# EAGLE board CT_schematic (EAGLE 7.6.0)

Size 100 x 80 mm. Coordinates in mm from the lower left corner, seen from the top.
Outline: 0,0 100,0 100,80 0,80 0,0
Copper layers (1*16): Top 0.035mm / dielectric 1.5mm / Bottom 0.035mm
Design rules "default": minimum track width 10mil, minimum drill 24mil, track to track 8mil, track to pad 8mil, pad to pad 8mil, via to via 8mil, smd to smd 8mil, copper to edge 40mil, drill to drill 8mil, minimum pad ring 10mil, minimum via ring 8mil, stop-mask expansion 4mil, vias tented up to drill 0mil, thermal gap 10mil

## Footprints (pad centres in the part's own frame; a part is rotated, then mirrored left to right if it is on the bottom)
C0603 = smd 0.8 x 0.8: 1 -0.762,0; 2 0.762,0
C0402 = smd 0.5 x 0.5: 1 -0.508,0; 2 0.508,0
C0805 = smd 1.2 x 1.3: 1 -1.016,0; 2 1.016,0
C1210 = smd 1.2 x 2.5: 1 -1.524,0; 2 1.524,0
C1206 = smd 1.3 x 1.6: 1 -1.524,0; 2 1.524,0
L0603 = smd 0.8 x 0.8: 1 -0.762,0; 2 0.762,0
L1210 = smd 1.2 x 2.5: 1 -1.524,0; 2 1.524,0
L0806 = smd 1.016 x 1.524: 1 -0.889,0; 2 0.889,0
R0603 = smd 0.8 x 0.8: 1 -0.762,0; 2 0.762,0
LQFP144 = smd 0.35 x 1.35: 1 -8.75,-10.625; 2 -8.25,-10.625; 3 -7.75,-10.625; 4 -7.25,-10.625; 5 -6.75,-10.625; 6 -6.25,-10.625; 7 -5.75,-10.625; 8 -5.25,-10.625; 9 -4.75,-10.625; 10 -4.25,-10.625; 11 -3.75,-10.625; 12 -3.25,-10.625; 13 -2.75,-10.62; 14 -2.25,-10.625; 15 -1.75,-10.625; 16 -1.25,-10.625; 17 -0.75,-10.625; 18 -0.25,-10.625; 19 0.25,-10.625; 20 0.75,-10.625; 21 1.25,-10.625; 22 1.75,-10.625; 23 2.25,-10.625; 24 2.75,-10.62; 25 3.25,-10.625; 26 3.75,-10.625; 27 4.25,-10.625; 28 4.75,-10.625; 29 5.25,-10.625; 30 5.75,-10.625; 31 6.25,-10.625; 32 6.75,-10.625; 33 7.25,-10.625; 34 7.75,-10.625; 35 8.25,-10.625; 36 8.75,-10.625; 73 8.75,10.625; 74 8.25,10.625; 75 7.75,10.625; 76 7.25,10.625; 77 6.75,10.625; 78 6.25,10.625; 79 5.75,10.625; 80 5.25,10.625; 81 4.75,10.625; 82 4.25,10.625; 83 3.75,10.625; 84 3.25,10.625; 85 2.75,10.625; 86 2.25,10.625; 87 1.75,10.625; 88 1.25,10.625; 89 0.75,10.625; 90 0.25,10.625; 91 -0.25,10.625; 92 -0.75,10.625; 93 -1.25,10.625; 94 -1.75,10.625; 95 -2.25,10.625; 96 -2.75,10.625; 97 -3.25,10.625; 98 -3.75,10.625; 99 -4.25,10.625; 100 -4.75,10.625; 101 -5.25,10.625; 102 -5.75,10.625; 103 -6.25,10.625; 104 -6.75,10.625; 105 -7.25,10.625; 106 -7.75,10.625; 107 -8.25,10.625; 108 -8.75,10.625 | smd 1.35 x 0.35: 37 10.625,-8.75; 38 10.625,-8.25; 39 10.625,-7.75; 40 10.625,-7.25; 41 10.625,-6.75; 42 10.625,-6.25; 43 10.625,-5.75; 44 10.625,-5.25; 45 10.625,-4.75; 46 10.625,-4.25; 47 10.625,-3.75; 48 10.625,-3.25; 49 10.625,-2.75; 50 10.625,-2.25; 51 10.625,-1.75; 52 10.625,-1.25; 53 10.625,-0.75; 54 10.625,-0.25; 55 10.625,0.25; 56 10.625,0.75; 57 10.625,1.25; 58 10.625,1.75; 59 10.625,2.25; 60 10.625,2.75; 61 10.625,3.25; 62 10.625,3.75; 63 10.625,4.25; 64 10.625,4.75; 65 10.625,5.25; 66 10.625,5.75; 67 10.625,6.25; 68 10.625,6.75; 69 10.625,7.25; 70 10.625,7.75; 71 10.625,8.25; 72 10.625,8.75; 109 -10.625,8.75; 110 -10.625,8.25; 111 -10.625,7.75; 112 -10.625,7.25; 113 -10.625,6.75; 114 -10.625,6.25; 115 -10.625,5.75; 116 -10.625,5.25; 117 -10.625,4.75; 118 -10.625,4.25; 119 -10.625,3.75; 120 -10.625,3.25; 121 -10.625,2.75; 122 -10.625,2.25; 123 -10.625,1.75; 124 -10.625,1.25; 125 -10.625,0.75; 126 -10.625,0.25; 127 -10.625,-0.25; 128 -10.625,-0.75; 129 -10.625,-1.25; 130 -10.625,-1.75; 131 -10.625,-2.25; 132 -10.625,-2.75; 133 -10.625,-3.25; 134 -10.625,-3.75; 135 -10.625,-4.25; 136 -10.625,-4.75; 137 -10.625,-5.25; 138 -10.625,-5.75; 139 -10.625,-6.25; 140 -10.625,-6.75; 141 -10.625,-7.25; 142 -10.625,-7.75; 143 -10.625,-8.25; 144 -10.625,-8.75
TST-110-05-T-D-RA = drill 1 pad 1.7 square: 1 0,0 | drill 1 pad 1.7: 2 0,2.54; 3 2.54,0; 4 2.54,2.54; 5 5.08,0; 6 5.08,2.54; 7 7.62,0; 8 7.62,2.54; 9 10.16,0; 10 10.16,2.54; 11 12.7,0; 12 12.7,2.54; 13 15.24,0; 14 15.24,2.54; 15 17.78,0; 16 17.78,2.54; 17 20.32,0; 18 20.32,2.54; 19 22.86,0; 20 22.86,2.54
SSOP-20 = smd 1.651 x 0.432: 1 -3.48,2.925; 2 -3.48,2.275; 3 -3.48,1.625; 4 -3.48,0.975; 5 -3.48,0.325; 6 -3.48,-0.325; 7 -3.48,-0.975; 8 -3.48,-1.625; 9 -3.48,-2.275; 10 -3.48,-2.925; 11 3.48,-2.925; 12 3.48,-2.275; 13 3.48,-1.625; 14 3.48,-0.975; 15 3.48,-0.325; 16 3.48,0.325; 17 3.48,0.975; 18 3.48,1.625; 19 3.48,2.275; 20 3.48,2.925
HTSS-105-01-G-D = drill 1 pad 1.8 square: 1 0,0 | drill 1 pad 1.8: 2 0,2.54; 3 2.54,0; 4 2.54,2.54; 5 5.08,0; 6 5.08,2.54; 7 7.62,0; 8 7.62,2.54; 9 10.16,0; 10 10.16,2.54
FCI_10118193-0001LF = smd 0.4 x 1.35: 1 -1.3,2.675; 2 -0.65,2.675; 3 0,2.675; 4 0.65,2.675; 5 1.3,2.675 | smd 1.6 x 1.4: 6 -3.2,2.45; 7 3.2,2.45 | smd 1.9 x 1.9: 8 -1.2,0; 9 1.2,0 | hole 0.5: -3.3,0; 3.3,0
SOT143B = smd 1 x 0.7: 1 -0.75,-1 | smd 0.6 x 0.7: 2 0.95,-1; 3 0.95,1; 4 -0.95,1
QFN-28 = smd 0.813 x 0.305: 1 -2.451,1.5; 2 -2.451,1; 3 -2.451,0.5; 4 -2.451,0; 5 -2.451,-0.5; 6 -2.451,-1; 7 -2.451,-1.5; 15 2.451,-1.5; 16 2.451,-1; 17 2.451,-0.5; 18 2.451,0; 19 2.451,0.5; 20 2.451,1; 21 2.451,1.5 | smd 0.305 x 0.813: 8 -1.5,-2.451; 9 -1,-2.451; 10 -0.5,-2.451; 11 0,-2.451; 12 0.5,-2.451; 13 1,-2.451; 14 1.5,-2.451; 22 1.5,2.451; 23 1,2.451; 24 0.5,2.451; 25 0,2.451; 26 -0.5,2.451; 27 -1,2.451; 28 -1.5,2.451 | smd 3.607 x 3.607: 29 0,0
SJ-43515TS-SMT-TR = smd 2.2 x 3: 1 0.6,-7.4; 4 3.4,-7.4 | smd 3 x 3: 2 12.8,-7.4; 5 17,-3 | smd 2 x 3: 3 5.3,0; 6 2.5,0 | drill 1.8: P$7 4.5,-3.69; P$8 11.54,-3.69
ABS07-32.768KHZ-7-T = smd 1.1 x 2.4: 1 -2.5,0; 2 0,0
ABLS-25.000MHZ-B2F-T = smd 5.6 x 2.8: 1 -3.81,0; 2 5.69,0
ASFL1 = smd 1.7 x 1.5: 1 -1.27,-1.1; 2 1.27,-1.1; 3 1.27,1.1; 4 -1.27,1.1
TSOT-23-5 = smd 1.3 x 0.62: 1 -1.31,0.95; 2 -1.31,0; 3 -1.31,-0.95; 4 1.31,-0.95; 5 1.31,0.95
DFN8_2X3MC = smd 0.813 x 0.305: 1 -1.398,0.75; 2 -1.398,0.25; 3 -1.398,-0.25; 4 -1.398,-0.75; 5 1.398,-0.75; 6 1.398,-0.25; 7 1.398,0.25; 8 1.398,0.75 | smd 1.753 x 1.549: 9 0,0
JST-2-SMD = smd 1 x 4.6: 1 -1,-3.7; 2 1,-3.7 | smd 1.6 x 3.4: NC1 -3.4,1.5; NC2 3.4,1.5
SON-6 = smd 0.55 x 0.3: 1 -0.355,0.5 | smd 0.52 x 0.3: 2 -0.37,0; 3 -0.37,-0.5; 4 0.37,-0.5; 5 0.37,0; 6 0.37,0.5
SW_4-1437565-2 = smd 1.4 x 2.1: 1 -2.23,4.55; 2 -2.23,-4.55; 3 2.23,4.55; 4 2.23,-4.55
LGM67K-G1J2-24-Z = smd 0.8 x 1.4: A -2,0; C 0,0
NC7SZ125M5X = smd 1.3 x 0.7: 1 -1.3,0.95; 2 -1.3,0; 3 -1.3,-0.95; 4 1.3,-0.95; 5 1.3,0.95
DUMMY_PACKAGE_190 = drill 0.3: 1 0,-1; 2 1.5,-1

## Placement (x,y rotation side)
C1  1e-06  [C0603]  -33.02,77.47 0 top  (outside the outline)
C2  1e-07  [C0603]  -36.83,77.47 0 top  (outside the outline)
C3  1e-07  [C0603]  -40.64,77.47 0 top  (outside the outline)
C4  1e-07  [C0603]  -44.45,77.47 0 top  (outside the outline)
C5  1e-07  [C0603]  -48.26,77.47 0 top  (outside the outline)
C6  1e-07  [C0603]  -52.07,77.47 0 top  (outside the outline)
C7  1e-07  [C0603]  -55.88,77.47 0 top  (outside the outline)
C8  1e-07  [C0603]  -59.69,77.47 0 top  (outside the outline)
C9  1e-07  [C0603]  -63.5,77.47 0 top  (outside the outline)
C10  1e-07  [C0603]  -67.31,77.47 0 top  (outside the outline)
C11  1e-07  [C0603]  -71.12,77.47 0 top  (outside the outline)
C12  1e-07  [C0603]  -74.93,77.47 0 top  (outside the outline)
C13  1e-07  [C0603]  -78.74,77.47 0 top  (outside the outline)
C14  4.7e-06  [C0603]  -29.21,77.47 0 top  (outside the outline)
C15  1e-08  [C0603]  -15.24,82.55 0 top  (outside the outline)
C16  1e-06  [C0603]  -19.05,82.55 0 top  (outside the outline)
C17  1e-11  [C0402]  -57.15,82.55 0 top  (outside the outline)
C18  1e-11  [C0402]  -60.96,82.55 0 top  (outside the outline)
C19  1e-11  [C0402]  -64.77,82.55 0 top  (outside the outline)
C20  1e-11  [C0402]  -68.58,82.55 0 top  (outside the outline)
C21  1e-07  [C0402]  -72.39,82.55 0 top  (outside the outline)
C22  1e-06  [C0603]  -22.86,82.55 0 top  (outside the outline)
C23  1e-06  [C0603]  -26.67,82.55 0 top  (outside the outline)
C24  1e-06  [C0603]  -30.48,82.55 0 top  (outside the outline)
C25  4.7e-06  [C0805]  -40.64,66.04 0 top  (outside the outline)
C26  2.2e-05  [C1210]  -57.15,58.42 0 top  (outside the outline)
C27  2.2e-05  [C1210]  -63.5,58.42 0 top  (outside the outline)
C28  1e-09  [C0402]  -76.2,82.55 0 top  (outside the outline)
C29  1e-09  [C0402]  -80.01,82.55 0 top  (outside the outline)
C30  1e-07  [C0402]  -15.24,87.63 0 top  (outside the outline)
C31  1e-07  [C0402]  -19.05,87.63 0 top  (outside the outline)
C32  1e-07  [C0402]  -22.86,87.63 0 top  (outside the outline)
C33  1e-07  [C0402]  -26.67,87.63 0 top  (outside the outline)
C34  1e-07  [C0402]  -30.48,87.63 0 top  (outside the outline)
C35  1e-05  [C0805]  -45.72,66.04 0 top  (outside the outline)
C36  1e-05  [C0805]  -50.8,66.04 0 top  (outside the outline)
C37  1e-05  [C0805]  -55.88,66.04 0 top  (outside the outline)
C38  1e-05  [C0805]  -60.96,66.04 0 top  (outside the outline)
C39  1e-05  [C0805]  -66.04,66.04 0 top  (outside the outline)
C40  1e-08  [C0402]  -34.29,87.63 0 top  (outside the outline)
C41  1e-05  [C0805]  -71.12,66.04 0 top  (outside the outline)
C42  1e-05  [C0805]  -76.2,66.04 0 top  (outside the outline)
C43  1e-07  [C0402]  -38.1,87.63 0 top  (outside the outline)
C44  1e-05  [C1206]  -76.2,58.42 0 top  (outside the outline)
C45  1e-05  [C1206]  -16.51,66.04 0 top  (outside the outline)
C46  1e-08  [C0402]  -41.91,87.63 0 top  (outside the outline)
C47  1e-08  [C0402]  -45.72,87.63 0 top  (outside the outline)
F1  240.0  [L0603]  -34.29,82.55 0 top  (outside the outline)
I1  1.5e-05  [L1210]  -69.85,58.42 0 top  (outside the outline)
I2  1.5e-06  [L0806]  -22.86,66.04 0 top  (outside the outline)
R2  1000.0  [R0603]  -38.1,82.55 0 top  (outside the outline)
R4  4700.0  [R0603]  -41.91,82.55 0 top  (outside the outline)
R5  10000.0  [R0603]  -58.42,72.39 0 top  (outside the outline)
R6  10000.0  [R0603]  -63.5,72.39 0 top  (outside the outline)
R7  100000.0  [R0603]  -27.94,72.39 0 top  (outside the outline)
R8  100000.0  [R0603]  -33.02,72.39 0 top  (outside the outline)
R9  100000.0  [R0603]  -38.1,72.39 0 top  (outside the outline)
R10  47000.0  [R0603]  -68.58,72.39 0 top  (outside the outline)
R11  47000.0  [R0603]  -73.66,72.39 0 top  (outside the outline)
R12  47000.0  [R0603]  -78.74,72.39 0 top  (outside the outline)
R13  680.0  [R0603]  -45.72,82.55 0 top  (outside the outline)
R14  220000.0  [R0603]  -43.18,72.39 0 top  (outside the outline)
R15  1000000.0  [R0603]  -22.86,72.39 0 top  (outside the outline)
R16  10000.0  [R0603]  -15.24,77.47 0 top  (outside the outline)
R17  10000.0  [R0603]  -20.32,77.47 0 top  (outside the outline)
R18  9100.0  [R0603]  -49.53,82.55 0 top  (outside the outline)
R19  680000.0  [R0603]  -48.26,72.39 0 top  (outside the outline)
R20  120000.0  [R0603]  -53.34,72.39 0 top  (outside the outline)
R21  2000.0  [R0603]  -53.34,82.55 0 top  (outside the outline)
R22  10000.0  [R0603]  -25.4,77.47 0 top  (outside the outline)
U1  STM32F303ZDT6  [LQFP144]  -24.13,11.43 0 top  (outside the outline)
U2  TST-110-05-T-D-RA  [TST-110-05-T-D-RA]  -46.99,49.53 0 top  (outside the outline)
U3  MAX3218EAP+T  [SSOP-20]  -36.83,41.91 0 top  (outside the outline)
U4  HTSS-105-01-G-D  [HTSS-105-01-G-D]  -27.94,41.91 0 top  (outside the outline)
U5  10118193-0001LF  [FCI_10118193-0001LF]  -68.58,41.91 0 top  (outside the outline)
U6  prtr5v0u2ax  [SOT143B]  -58.42,87.63 0 top  (outside the outline)
U7  WM8731CLSEFL  [QFN-28]  -49.53,59.69 0 top  (outside the outline)
U8  SJ-43515TS-SMT-TR  [SJ-43515TS-SMT-TR]  -62.23,10.16 0 top  (outside the outline)
U9  SJ-43515TS-SMT-TR  [SJ-43515TS-SMT-TR]  -39.37,33.02 0 top  (outside the outline)
U10  ABS07-32.768KHZ-7-T  [ABS07-32.768KHZ-7-T]  -27.94,59.69 0 top  (outside the outline)
U11  ABLS-25.000MHZ-B2F-T  [ABLS-25.000MHZ-B2F-T]  -62.23,52.07 0 top  (outside the outline)
U12  ASFL1-12.288MHZ-EC-T  [ASFL1]  -59.69,43.18 0 top  (outside the outline)
U13  ltc3406es5  [TSOT-23-5]  -15.24,71.12 0 top  (outside the outline)
U14  MCP73831T-2ACI/MC  [DFN8_2X3MC]  -72.39,86.36 0 top  (outside the outline)
U15  S2B-PH-SM4-TB(LF)(SN)  [JST-2-SMD]  -69.85,29.21 0 top  (outside the outline)
U16  TPS3895ADRYR  [SON-6]  -66.04,86.36 0 top  (outside the outline)
U17  4-1437565-2  [SW_4-1437565-2]  -55.88,29.21 0 top  (outside the outline)
U18  Q65110A2395  [LGM67K-G1J2-24-Z]  -36.83,59.69 0 top  (outside the outline)
U19  nc7sz125m5x  [NC7SZ125M5X]  -27.94,66.04 0 top  (outside the outline)
U20  nc7sz125m5x  [NC7SZ125M5X]  -34.29,66.04 0 top  (outside the outline)
U21  Dummy  [DUMMY_PACKAGE_190]  -63.5,87.63 0 top  (outside the outline)

## Library data of the parts
C1-C47 F1 I1 I2 R2 R4-R22 U1-U21 = circuit_tree

## Nets
CLK_CRYSTAL_U1_8: C17.1 U1.8 U10.1
CLK_CRYSTAL_U1_9: C18.1 U1.9 U10.2
CLK_CRYSTAL_U1_23: C19.1 U1.23 U11.1
CLK_CRYSTAL_U1_24: C20.1 U1.24 U11.2
CLK_U7_1: U7.1 U12.3
GND: C1.2 C2.2 C3.2 C4.2 C5.2 C6.2 C7.2 C8.2 C9.2 C10.2 C11.2 C12.2 C13.2 C14.2 C15.2 C16.2 C17.2 C18.2 C19.2 C20.2 C21.2 C22.2 C23.2 C24.2 C29.2 C30.2 C31.2 C32.2 C33.2 C34.2 C35.2 C36.2 C37.2 C38.2 C39.2 C40.2 C41.2 C42.1 C42.2 C43.2 C44.2 C45.2 C46.2 C47.2 R2.2 R5.2 R10.2 R11.2 R12.2 R14.2 R18.2 R20.2 R21.2 U1.16 U1.30 U1.31 U1.38 U1.51 U1.61 U1.71 U1.83 U1.94 U1.107 U1.120 U1.130 U1.143 U2.4 U2.6 U2.8 U2.10 U2.12 U2.14 U2.16 U2.18 U2.20 U3.5 U3.17 U3.20 U4.9 U5.5 U5.6 U5.7 U5.8 U5.9 U6.1 U7.4 U7.15 U7.19 U7.25 U7.26 U7.29 U8.1 U9.1 U12.2 U13.2 U14.6 U14.9 U15.2 U16.2 U18.C U19.2 U19.3 U20.1 U20.3 U21.1
INPUT_USBPOWER_5V: C44.1 R22.2 U5.1 U6.4 U14.1 U14.2
NET_U1_25: R4.1 U1.25 U20.4
NET_U1_33: C15.1 C16.1 F1.1 U1.32 U1.33
NET_U1_138: R5.1 U1.138
NET_U1_141: U18.A
NET_U1_142: U17.3 U17.4
NET_U3_1: I1.1 U3.1
NET_U3_2: R7.1 U3.2
NET_U3_3: R8.1 U3.3
NET_U3_4: R9.1 U3.4
NET_U3_15: C24.1 U3.15
NET_U3_16: C25.2 U3.16
NET_U3_18: C25.1 U3.18
NET_U3_19: C23.1 U3.19
NET_U4_3: U3.12 U4.3
NET_U4_4: U3.11 U4.4
NET_U4_5: U3.14 U4.5
NET_U4_6: U3.13 U4.6
NET_U7_9: U7.9
NET_U7_20: C34.1 C39.1 U7.20
NET_U8_2: C27.1 R11.1 U8.2
NET_U8_5: C26.1 R10.1 U8.5
NET_U8_13: C26.2
NET_U8_14: C27.2
NET_U9_5: C28.1 C29.1 R12.1 R13.1 U9.5
NET_U9_21: R13.2
NET_U9_22: C28.2
NET_U13_1: U13.1
NET_U13_3: I2.1 U13.3
NET_U13_5: R14.1 R15.1 U13.5
NET_U13_ATNET_3: I2.2 R15.2
NET_U14_5: R22.1 U14.5
NET_U14_8: R21.1 U14.8
NET_U16_1: R17.1 R18.1 U16.1
NET_U16_3: R19.2 R20.1 U16.3
NET_U16_4: R16.1 U16.4 U19.4 U20.2
NET_U17_1: R2.1 U17.1 U17.2
PROC_DAC1_OUT2: U1.41 U21.2
PROC_I2S2_CK: U1.74 U7.7
PROC_I2S2_EXT_SD: U1.75 U7.10
PROC_I2S2_SD: U1.76 U7.8
PROC_I2S2_WS: U1.73 U7.9 U7.11
PROC_SYS_JTCK_SWCLK: U1.109 U2.9
PROC_SYS_JTDO_TRACESWO: U1.133 U2.13
PROC_SYS_JTMS_SWDIO: U1.105 U2.7
PROC_UART4_RX: U1.112 U3.9
PROC_UART4_TX: U1.111 U3.7
PROC_USB_DM: U1.103 U5.2 U6.3
PROC_USB_DP: U1.104 U5.3 U6.2
RST_OUT_U2_SRESET_B: R6.1 U2.15 U19.1
VCC_S1_3V7: C41.1 C45.1 U13.4 U14.3 U14.4 U15.1
VCC_TIER1_3V3: C1.1 C2.1 C3.1 C4.1 C5.1 C6.1 C7.1 C8.1 C9.1 C10.1 C11.1 C12.1 C13.1 C14.1 C21.1 C22.1 C30.1 C31.1 C32.1 C33.1 C35.1 C36.1 C37.1 C38.1 C40.1 C42.2 C43.1 C46.1 C47.1 F1.2 I1.2 I2.2 R4.2 R6.2 R7.2 R8.2 R9.2 R15.2 R16.2 R17.2 R19.1 U1.6 U1.17 U1.39 U1.52 U1.62 U1.72 U1.84 U1.95 U1.108 U1.121 U1.131 U1.144 U2.1 U3.6 U7.3 U7.5 U7.12 U7.18 U12.4 U16.6 U19.5 U20.5

## Tracks (layer width: path | path; a pad name or v marks a point on that pad's centre or on a via)
CLK_CRYSTAL_U1_8  (2 unrouted)
CLK_CRYSTAL_U1_9  (2 unrouted)
CLK_CRYSTAL_U1_23  (2 unrouted)
CLK_CRYSTAL_U1_24  (2 unrouted)
CLK_U7_1  (1 unrouted)
GND  (104 unrouted)
INPUT_USBPOWER_5V  (5 unrouted)
NET_U1_25  (2 unrouted)
NET_U1_33  (4 unrouted)
NET_U1_138  (1 unrouted)
NET_U1_142  (1 unrouted)
NET_U3_1  (1 unrouted)
NET_U3_2  (1 unrouted)
NET_U3_3  (1 unrouted)
NET_U3_4  (1 unrouted)
NET_U3_15  (1 unrouted)
NET_U3_16  (1 unrouted)
NET_U3_18  (1 unrouted)
NET_U3_19  (1 unrouted)
NET_U4_3  (1 unrouted)
NET_U4_4  (1 unrouted)
NET_U4_5  (1 unrouted)
NET_U4_6  (1 unrouted)
NET_U7_20  (2 unrouted)
NET_U8_2  (2 unrouted)
NET_U8_5  (2 unrouted)
NET_U9_5  (4 unrouted)
NET_U13_3  (1 unrouted)
NET_U13_5  (2 unrouted)
NET_U13_ATNET_3  (1 unrouted)
NET_U14_5  (1 unrouted)
NET_U14_8  (1 unrouted)
NET_U16_1  (2 unrouted)
NET_U16_3  (2 unrouted)
NET_U16_4  (3 unrouted)
NET_U17_1  (2 unrouted)
PROC_DAC1_OUT2  (1 unrouted)
PROC_I2S2_CK  (1 unrouted)
PROC_I2S2_EXT_SD  (1 unrouted)
PROC_I2S2_SD  (1 unrouted)
PROC_I2S2_WS  (2 unrouted)
PROC_SYS_JTCK_SWCLK  (1 unrouted)
PROC_SYS_JTDO_TRACESWO  (1 unrouted)
PROC_SYS_JTMS_SWDIO  (1 unrouted)
PROC_UART4_RX  (1 unrouted)
PROC_UART4_TX  (1 unrouted)
PROC_USB_DM  (2 unrouted)
PROC_USB_DP  (2 unrouted)
RST_OUT_U2_SRESET_B  (2 unrouted)
VCC_S1_3V7  (5 unrouted)
VCC_TIER1_3V3  (62 unrouted)